# Altium PCB ESP_with_usb.PcbDoc
Units mil, origin at the board's own origin, x right, y up, seen from the top; angles counter-clockwise.
Board outline 1102.36 x 570.87 mil, 2 copper layers (Top Layer, Bottom Layer); 20 components, 18 nets, 80 pads, 15 vias.
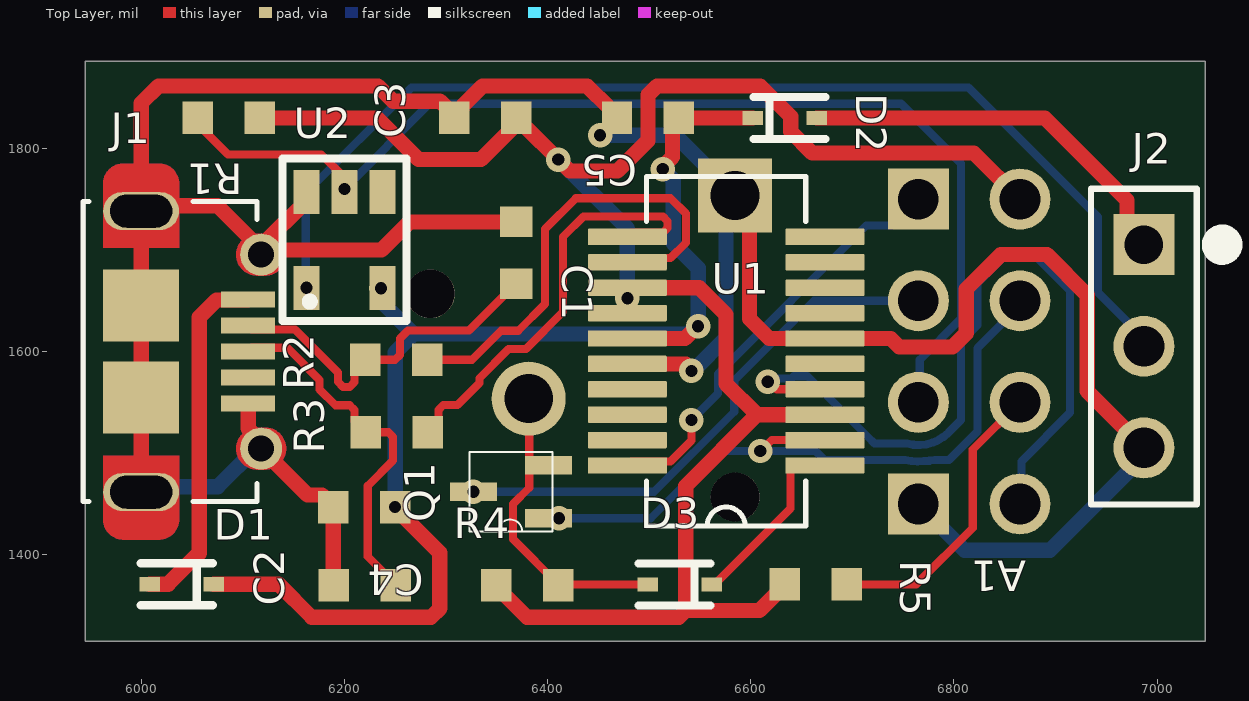
[diagram p0: Top Layer view]
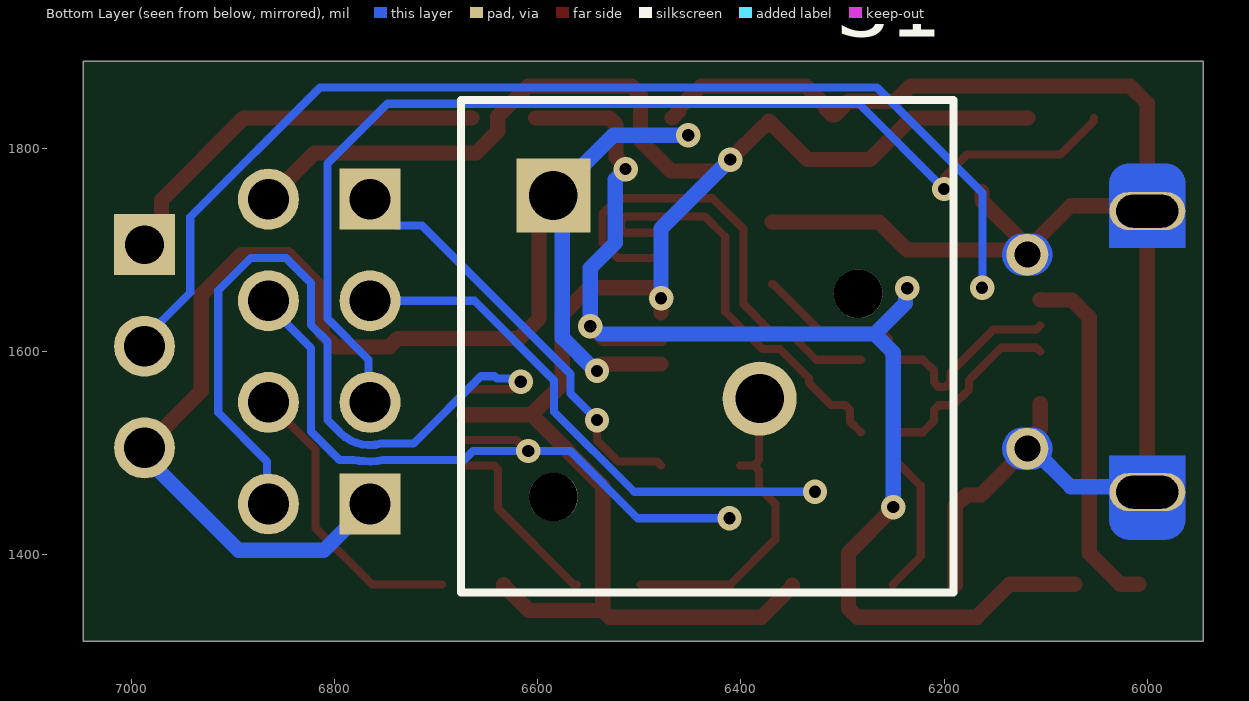
[diagram p1: Bottom Layer view, seen from below]
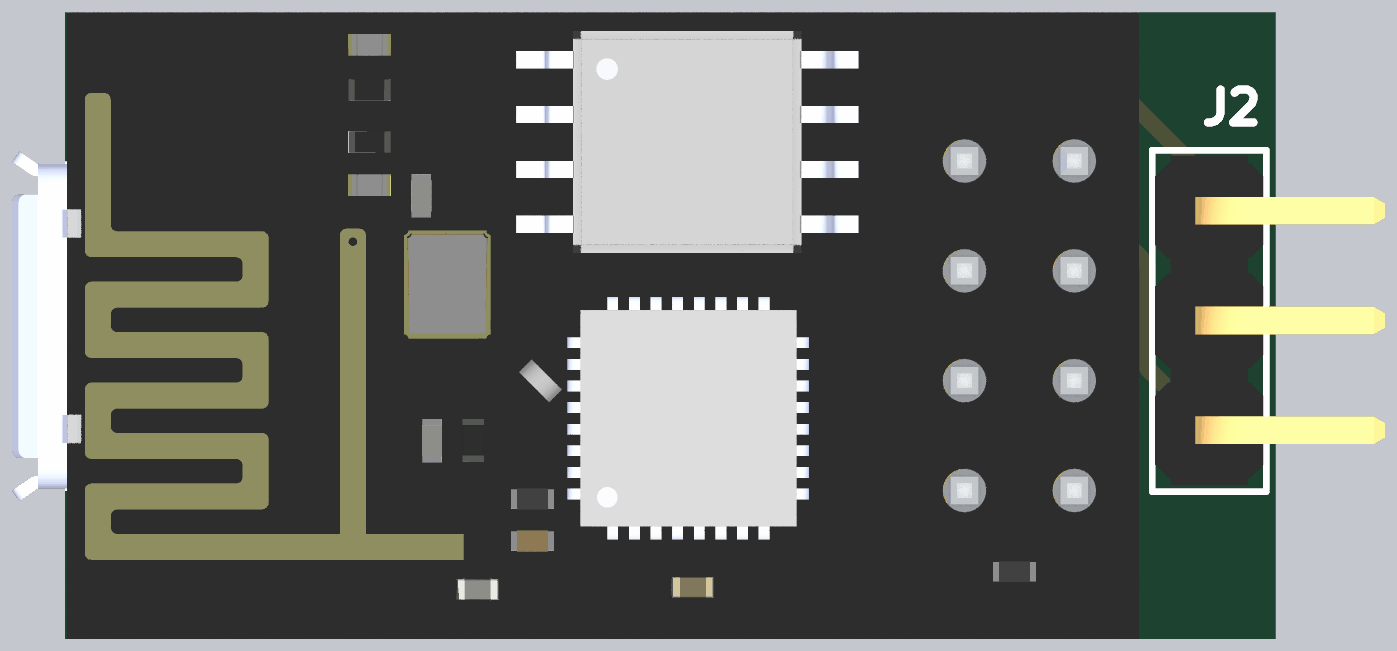
[diagram p2: 3D render of the assembled board from above, using the file's embedded part models]

## Layer stack, top to bottom
Top Solder: solder mask 0.4, Solder Resist, Dk 3.5
Top Layer: signal copper 1.4
Dielectric 1: dielectric 12.6, FR-4, Dk 4.8
Bottom Layer: signal copper 1.4
Bottom Solder: solder mask 0.4, Solder Resist, Dk 3.5

## Board outline
5945,1315 7047.36,1315 7047.36,1885.87 5945,1885.87

## Design rules (kind name [scope] priority, off if disabled: settings)
Clearance [All] p1: gap=8 ignorepadtopadclearanceinfootprint=FALSE except(0: Arc-Hole Track-Hole SMDPad-Hole THPad-Hole Via-Hole Fill-Hole Poly-Hole Region-Hole Text-Hole)
DiffPairsRouting [All] p1: maxlimit=10 minlimit=10 mostfreqgap=10 toplayer_minwidth=8 toplayer_maxwidth=15 toplayer_prefwidth=8 bottomlayer_minwidth=8 bottomlayer_maxwidth=15 bottomlayer_prefwidth=8 maxuncoupledlength=500
MatchedLengths [All] p1: tolerance=50 checknetsindiffpair=TRUE checkdiffpairvsdiffpair=FALSE checkxsignals=FALSE checkothers=FALSE
MinimumSolderMaskSliver [All] p1: minsoldermaskwidth=7.87
PolygonConnect [All] p1: connectstyle=Relief reliefconductorwidth=10 reliefentries=4 polygonreliefangle="90 Angle" airgapwidth=10
RoutingVias [All] p1: holewidth=12 width=24 viastyle="Through Hole" minholewidth=12 minwidth=24 maxholewidth=28 maxwidth=50
SolderMaskExpansion [All] p1: expansion=4 istentingtop=FALSE
Width [All] p1: maxlimit=15 minlimit=8 preferedwidth=8
28 further rules are at their usual default settings.

## Classes and differential pairs
component class ESP_with_usb: A1 C3 C4 C5 D1 D2 J1 J2 R1 S1 U2
differential pair USB2: +USB2_P -USB2_N
differential pair USB1: +USB1_P -USB1_N

## Components (designator, comment, footprint, x,y, rotation, side; value= is the part's Value field where it differs from the comment)
A1 "ESP8266" ESP8266 6865,1450 r180 top
C1 "47pF" 0603 6369.36,1696.01 r270 top value=Value
C2 "47pF" 0603 6221,1370 r0 top value=Value
C3 "0.1uF" 0603 6340,1830 r0 top value=Value
C4 "0.1uF" 0603 6220.64,1446.92 r0 top value=Value
C5 "10uF" 0603 6500,1830 r0 top value=Value
D1 "Diode, Schottky" SOD-523 6039.98,1371.06 r0 top
D2 "Diode, Schottky" SOD-523 6633.36,1830 r180 top
D3 "Diode" SOD-523 6530,1370.86 r0 top
J1 "micro USB B" "Micro USB B (rev 2)" 6002.95,1600 r270 top
J2 "3x Header Pins" "3 HEADER PIN 90 DEG" 6987,1705.28 r90 top value=Value
Q1 "N MOSFET" SOT-323 6364,1462 r180 top
R1 "10K Ω" 0603 6085,1830 r180 top value=Value
R2 "27 Ω" 0603 6250,1592 r180 top value=Value
R3 "27 Ω" 0603 6250.36,1520.59 r180 top value=Value
R4 "10K Ω" 0603 6381,1370 r0 top value=Value
R5 "10K Ω" 0603 6665,1370.86 r0 top value=Value
S1 "Pushbutton switch" KS11R21 6433,1605.28 r180 bottom
U1 "USB interface" 20-SSOP 6575.79,1600.39 r180 top
U2 "Buffer/level shifter" SOT-23-5 6200,1710 r270 top value=Value

## Footprints (in the part's own frame and the unit in brackets; to place one, negate y for a bottom-side part, rotate by r counter-clockwise, add the part's x,y. Pads: shape width x height; smd on the part's side, far side on the other; paste and mask are expansions set on the pad)
"3 HEADER PIN 90 DEG" [mil]
  rect 60x60 hole 38 mask+0: 1(0,0)
  round 60 hole 40 mask+0: 2(-100,0) 3(-200,0)
  silkscreen extent -256,-87 55,52, body extent -250,-160 50,49, height 163
20-SSOP [mm]
  rrect10% 1.97x0.41 smd: 1(-2.47,2.857) 2(-2.47,2.222) 3(-2.47,1.587) 4(-2.47,0.952) 5(-2.47,0.317) 6(-2.47,-0.318) 7(-2.47,-0.953) 8(-2.47,-1.588) 9(-2.47,-2.223) 10(-2.47,-2.858) 11(2.47,-2.857) 12(2.47,-2.222) 13(2.47,-1.587) 14(2.47,-0.952) 15(2.47,-0.317) 16(2.47,0.318) 17(2.47,0.953) 18(2.47,1.588) 19(2.47,2.223) 20(2.47,2.858)
  silkscreen extent -1.99,-4.37 1.99,4.37, body extent -3.1,-4.33 3.1,4.33, height 1.76
0603 [mil]
  rect 30x32 smd paste+0 mask+0: 1(-31.64,0) 2(29.36,0)
  body extent -33,-16 30,16, height 28
ESP8266 [mil]
  round 60 hole 40: 1(0,0) 2(0,-100) 3(0,-200) 4(0,-300) 6(100,-200) 7(100,-100)
  rect 60x60 hole 40: 5(100,-300) 8(100,0)
  body extent -58,-436 918,135, height 221
KS11R21 [mm]
  rect 1.85x1.85 hole 1.22: 1(-3.85,3.77)
  round 1.85 hole 1.22: 3(1.31,-1.31)
  round 1.22 hole 1.22 unplated: ""(-3.85,-3.77) ""(3.77,1.31)
  silkscreen extent -6.16,-6.16 6.16,6.16, body extent -6.07,-6.25 6.25,6.07, height 9.86
"Micro USB B (rev 2)" [mm]
  rect 0.4x1.35 smd: 1(-1.3,2.6) 2(-0.65,2.6) 3(0,2.6) 4(0.65,2.6) 5(1.3,2.6)
  round 1.05 hole 0.65: S1(-2.425,2.925) S2(2.425,2.925)
  oval 0.95x1.9 hole 0.825 slot 1.55 at 90 deg: S3(-3.512,-0.075) S6(3.512,-0.075)
  rect 1.8x1.9 smd: S4(-1.15,-0.075) S5(1.15,-0.075)
  Top Layer region: -2.425,3.35 -2.425,3.55 -2.398,3.549 -2.37,3.547 -2.343,3.544 -2.316,3.539 -2.289,3.532 -2.263,3.524 -2.237,3.515 -2.211,3.505 -2.187,3.493 -2.163,3.48 -2.139,3.465 -2.116,3.45 -2.095,3.433 -2.074,3.415 -2.054,3.396 -2.035,3.376 -2.017,3.355 -2,3.334 -1.985,3.311 -1.97,3.287 -1.957,3.263 -1.945,3.239 -1.935,3.213 -1.926,3.187 -1.918,3.161 -1.911,3.134 -1.906,3.107 -1.903,3.08 -1.901,3.052 -1.9,3.025 -1.9,2.825 -1.901,2.798 -1.903,2.77 -1.906,2.743 -1.911,2.716 -1.918,2.689 -1.926,2.663 -1.935,2.637 -1.945,2.611 -1.957,2.587 -1.97,2.562 -1.985,2.539 -2,2.516 -2.017,2.495 -2.035,2.474 -2.054,2.454 -2.074,2.435 -2.095,2.417 -2.116,2.4 -2.139,2.385 -2.163,2.37 -2.187,2.357 -2.211,2.345 -2.237,2.335 -2.263,2.326 -2.289,2.318 -2.316,2.311 -2.343,2.306 -2.37,2.303 -2.398,2.301 -2.425,2.3 -2.425,2.5 -2.408,2.5 -2.391,2.502 -2.374,2.504 -2.357,2.507 -2.341,2.511 -2.325,2.516 -2.309,2.522 -2.293,2.528 -2.277,2.535 -2.262,2.544 -2.248,2.552 -2.234,2.562 -2.22,2.572 -2.208,2.583 -2.195,2.595 -2.183,2.608 -2.172,2.62 -2.162,2.634 -2.152,2.648 -2.144,2.662 -2.135,2.677 -2.128,2.693 -2.122,2.709 -2.116,2.725 -2.111,2.741 -2.107,2.757 -2.104,2.774 -2.102,2.791 -2.1,2.808 -2.1,2.825 -2.1,3.025 -2.1,3.042 -2.102,3.059 -2.104,3.076 -2.107,3.093 -2.111,3.109 -2.116,3.125 -2.122,3.141 -2.128,3.157 -2.135,3.173 -2.144,3.187 -2.152,3.202 -2.162,3.216 -2.172,3.23 -2.183,3.242 -2.195,3.255 -2.208,3.267 -2.22,3.278 -2.234,3.288 -2.248,3.298 -2.262,3.306 -2.277,3.315 -2.293,3.322 -2.309,3.328 -2.325,3.334 -2.341,3.339 -2.357,3.343 -2.374,3.346 -2.391,3.348 -2.408,3.35 -2.425,3.35
  Top Layer region: -2.425,2.5 -2.425,2.3 -2.452,2.301 -2.48,2.303 -2.507,2.306 -2.534,2.311 -2.561,2.318 -2.587,2.326 -2.613,2.335 -2.639,2.345 -2.663,2.357 -2.688,2.37 -2.711,2.385 -2.734,2.4 -2.755,2.417 -2.776,2.435 -2.796,2.454 -2.815,2.474 -2.833,2.495 -2.85,2.516 -2.865,2.539 -2.88,2.562 -2.893,2.587 -2.905,2.611 -2.915,2.637 -2.924,2.663 -2.932,2.689 -2.939,2.716 -2.944,2.743 -2.947,2.77 -2.949,2.798 -2.95,2.825 -2.95,3.025 -2.949,3.052 -2.947,3.08 -2.944,3.107 -2.939,3.134 -2.932,3.161 -2.924,3.187 -2.915,3.213 -2.905,3.239 -2.893,3.263 -2.88,3.287 -2.865,3.311 -2.85,3.334 -2.833,3.355 -2.815,3.376 -2.796,3.396 -2.776,3.415 -2.755,3.433 -2.734,3.45 -2.711,3.465 -2.688,3.48 -2.663,3.493 -2.639,3.505 -2.613,3.515 -2.587,3.524 -2.561,3.532 -2.534,3.539 -2.507,3.544 -2.48,3.547 -2.452,3.549 -2.425,3.55 -2.425,3.35 -2.442,3.35 -2.459,3.348 -2.476,3.346 -2.493,3.343 -2.509,3.339 -2.525,3.334 -2.541,3.328 -2.557,3.322 -2.573,3.315 -2.588,3.306 -2.602,3.298 -2.616,3.288 -2.63,3.278 -2.642,3.267 -2.655,3.255 -2.667,3.242 -2.678,3.23 -2.688,3.216 -2.698,3.202 -2.706,3.187 -2.715,3.173 -2.722,3.157 -2.728,3.141 -2.734,3.125 -2.739,3.109 -2.743,3.093 -2.746,3.076 -2.748,3.059 -2.75,3.042 -2.75,3.025 -2.75,2.825 -2.75,2.808 -2.748,2.791 -2.746,2.774 -2.743,2.757 -2.739,2.741 -2.734,2.725 -2.728,2.709 -2.722,2.693 -2.715,2.677 -2.706,2.662 -2.698,2.648 -2.688,2.634 -2.678,2.62 -2.667,2.608 -2.655,2.595 -2.642,2.583 -2.63,2.572 -2.616,2.562 -2.602,2.552 -2.588,2.544 -2.573,2.535 -2.557,2.528 -2.541,2.522 -2.525,2.516 -2.509,2.511 -2.493,2.507 -2.476,2.504 -2.459,2.502 -2.442,2.5 -2.425,2.5
  Top Layer region: 2.425,3.35 2.425,3.55 2.452,3.549 2.48,3.547 2.507,3.544 2.534,3.539 2.561,3.532 2.587,3.524 2.613,3.515 2.639,3.505 2.663,3.493 2.688,3.48 2.711,3.465 2.734,3.45 2.755,3.433 2.776,3.415 2.796,3.396 2.815,3.376 2.833,3.355 2.85,3.334 2.865,3.311 2.88,3.287 2.893,3.263 2.905,3.239 2.915,3.213 2.924,3.187 2.932,3.161 2.939,3.134 2.944,3.107 2.947,3.08 2.949,3.052 2.95,3.025 2.95,2.825 2.949,2.798 2.947,2.77 2.944,2.743 2.939,2.716 2.932,2.689 2.924,2.663 2.915,2.637 2.905,2.611 2.893,2.587 2.88,2.562 2.865,2.539 2.85,2.516 2.833,2.495 2.815,2.474 2.796,2.454 2.776,2.435 2.755,2.417 2.734,2.4 2.711,2.385 2.688,2.37 2.663,2.357 2.639,2.345 2.613,2.335 2.587,2.326 2.561,2.318 2.534,2.311 2.507,2.306 2.48,2.303 2.452,2.301 2.425,2.3 2.425,2.5 2.442,2.5 2.459,2.502 2.476,2.504 2.493,2.507 2.509,2.511 2.525,2.516 2.541,2.522 2.557,2.528 2.573,2.535 2.588,2.544 2.602,2.552 2.616,2.562 2.63,2.572 2.642,2.583 2.655,2.595 2.667,2.608 2.678,2.62 2.688,2.634 2.698,2.648 2.706,2.662 2.715,2.677 2.722,2.693 2.728,2.709 2.734,2.725 2.739,2.741 2.743,2.757 2.746,2.774 2.748,2.791 2.75,2.808 2.75,2.825 2.75,3.025 2.75,3.042 2.748,3.059 2.746,3.076 2.743,3.093 2.739,3.109 2.734,3.125 2.728,3.141 2.722,3.157 2.715,3.173 2.706,3.187 2.698,3.202 2.688,3.216 2.678,3.23 2.667,3.242 2.655,3.255 2.642,3.267 2.63,3.278 2.616,3.288 2.602,3.298 2.588,3.306 2.573,3.315 2.557,3.322 2.541,3.328 2.525,3.334 2.509,3.339 2.493,3.343 2.476,3.346 2.459,3.348 2.442,3.35 2.425,3.35
  Top Layer region: 2.425,2.5 2.425,2.3 2.398,2.301 2.37,2.303 2.343,2.306 2.316,2.311 2.289,2.318 2.263,2.326 2.237,2.335 2.211,2.345 2.187,2.357 2.163,2.37 2.139,2.385 2.116,2.4 2.095,2.417 2.074,2.435 2.054,2.454 2.035,2.474 2.017,2.495 2,2.516 1.985,2.539 1.97,2.562 1.957,2.587 1.945,2.611 1.935,2.637 1.926,2.663 1.918,2.689 1.911,2.716 1.906,2.743 1.903,2.77 1.901,2.798 1.9,2.825 1.9,3.025 1.901,3.052 1.903,3.08 1.906,3.107 1.911,3.134 1.918,3.161 1.926,3.187 1.935,3.213 1.945,3.239 1.957,3.263 1.97,3.287 1.985,3.311 2,3.334 2.017,3.355 2.035,3.376 2.054,3.396 2.074,3.415 2.095,3.433 2.116,3.45 2.139,3.465 2.163,3.48 2.187,3.493 2.211,3.505 2.237,3.515 2.263,3.524 2.289,3.532 2.316,3.539 2.343,3.544 2.37,3.547 2.398,3.549 2.425,3.55 2.425,3.35 2.408,3.35 2.391,3.348 2.374,3.346 2.357,3.343 2.341,3.339 2.325,3.334 2.309,3.328 2.293,3.322 2.277,3.315 2.262,3.306 2.248,3.298 2.234,3.288 2.22,3.278 2.208,3.267 2.195,3.255 2.183,3.242 2.172,3.23 2.162,3.216 2.152,3.202 2.144,3.187 2.135,3.173 2.128,3.157 2.122,3.141 2.116,3.125 2.111,3.109 2.107,3.093 2.104,3.076 2.102,3.059 2.1,3.042 2.1,3.025 2.1,2.825 2.1,2.808 2.102,2.791 2.104,2.774 2.107,2.757 2.111,2.741 2.116,2.725 2.122,2.709 2.128,2.693 2.135,2.677 2.144,2.662 2.152,2.648 2.162,2.634 2.172,2.62 2.183,2.608 2.195,2.595 2.208,2.583 2.22,2.572 2.234,2.562 2.248,2.552 2.262,2.544 2.277,2.535 2.293,2.528 2.309,2.522 2.325,2.516 2.341,2.511 2.357,2.507 2.374,2.504 2.391,2.502 2.408,2.5 2.425,2.5
  Top Layer region: -2.6,0.875 -4.2,0.875 -4.226,0.874 -4.252,0.872 -4.278,0.869 -4.304,0.864 -4.329,0.858 -4.355,0.851 -4.379,0.842 -4.403,0.832 -4.427,0.821 -4.45,0.808 -4.472,0.794 -4.494,0.78 -4.515,0.764 -4.535,0.747 -4.554,0.729 -4.572,0.71 -4.589,0.69 -4.605,0.669 -4.619,0.647 -4.633,0.625 -4.645,0.602 -4.657,0.578 -4.667,0.554 -4.676,0.53 -4.683,0.504 -4.689,0.479 -4.694,0.453 -4.697,0.427 -4.699,0.401 -4.7,0.375 -4.7,-0.075 -3.925,-0.075 -3.925,0.375 -3.925,0.391 -3.923,0.406 -3.921,0.422 -3.918,0.437 -3.915,0.453 -3.91,0.468 -3.905,0.483 -3.899,0.497 -3.892,0.511 -3.885,0.525 -3.877,0.538 -3.868,0.551 -3.858,0.564 -3.848,0.576 -3.837,0.587 -3.826,0.598 -3.814,0.608 -3.801,0.618 -3.788,0.627 -3.775,0.635 -3.761,0.642 -3.747,0.649 -3.733,0.655 -3.718,0.66 -3.703,0.665 -3.687,0.668 -3.672,0.671 -3.656,0.673 -3.641,0.675 -3.625,0.675 -3.4,0.675 -3.384,0.675 -3.369,0.673 -3.353,0.671 -3.338,0.668 -3.322,0.665 -3.307,0.66 -3.292,0.655 -3.278,0.649 -3.264,0.642 -3.25,0.635 -3.237,0.627 -3.224,0.618 -3.211,0.608 -3.199,0.598 -3.188,0.587 -3.177,0.576 -3.167,0.564 -3.157,0.551 -3.148,0.538 -3.14,0.525 -3.133,0.511 -3.126,0.497 -3.12,0.483 -3.115,0.468 -3.11,0.453 -3.107,0.437 -3.104,0.422 -3.102,0.406 -3.1,0.391 -3.1,0.375 -3.1,-0.075 -2.6,-0.075 -2.6,0.875
  Top Layer region: 2.6,-1.025 4.2,-1.025 4.226,-1.024 4.252,-1.022 4.278,-1.019 4.304,-1.014 4.329,-1.008 4.355,-1.001 4.379,-0.992 4.403,-0.982 4.427,-0.971 4.45,-0.958 4.472,-0.944 4.494,-0.93 4.515,-0.914 4.535,-0.897 4.554,-0.879 4.572,-0.86 4.589,-0.84 4.605,-0.819 4.619,-0.797 4.633,-0.775 4.645,-0.752 4.657,-0.728 4.667,-0.704 4.676,-0.68 4.683,-0.654 4.689,-0.629 4.694,-0.603 4.697,-0.577 4.699,-0.551 4.7,-0.525 4.7,-0.075 3.925,-0.075 3.925,-0.525 3.925,-0.541 3.923,-0.556 3.921,-0.572 3.918,-0.587 3.915,-0.603 3.91,-0.618 3.905,-0.633 3.899,-0.647 3.892,-0.661 3.885,-0.675 3.877,-0.688 3.868,-0.701 3.858,-0.714 3.848,-0.726 3.837,-0.737 3.826,-0.748 3.814,-0.758 3.801,-0.768 3.788,-0.777 3.775,-0.785 3.761,-0.792 3.747,-0.799 3.733,-0.805 3.718,-0.81 3.703,-0.815 3.687,-0.818 3.672,-0.821 3.656,-0.823 3.641,-0.825 3.625,-0.825 3.4,-0.825 3.384,-0.825 3.369,-0.823 3.353,-0.821 3.338,-0.818 3.322,-0.815 3.307,-0.81 3.292,-0.805 3.278,-0.799 3.264,-0.792 3.25,-0.785 3.237,-0.777 3.224,-0.768 3.211,-0.758 3.199,-0.748 3.188,-0.737 3.177,-0.726 3.167,-0.714 3.157,-0.701 3.148,-0.688 3.14,-0.675 3.133,-0.661 3.126,-0.647 3.12,-0.633 3.115,-0.618 3.11,-0.603 3.107,-0.587 3.104,-0.572 3.102,-0.556 3.1,-0.541 3.1,-0.525 3.1,-0.075 2.6,-0.075 2.6,-1.025
  Top Layer region: -3.1,-0.075 -2.6,-0.075 -2.6,-1.025 -4.2,-1.025 -4.226,-1.024 -4.252,-1.022 -4.278,-1.019 -4.304,-1.014 -4.329,-1.008 -4.355,-1.001 -4.379,-0.992 -4.403,-0.982 -4.427,-0.971 -4.45,-0.958 -4.472,-0.944 -4.494,-0.93 -4.515,-0.914 -4.535,-0.897 -4.554,-0.879 -4.572,-0.86 -4.589,-0.84 -4.605,-0.819 -4.619,-0.797 -4.633,-0.775 -4.645,-0.752 -4.657,-0.728 -4.667,-0.704 -4.676,-0.68 -4.683,-0.654 -4.689,-0.629 -4.694,-0.603 -4.697,-0.577 -4.699,-0.551 -4.7,-0.525 -4.7,-0.075 -3.925,-0.075 -3.925,-0.55 -3.925,-0.564 -3.923,-0.579 -3.922,-0.593 -3.919,-0.607 -3.916,-0.621 -3.912,-0.635 -3.907,-0.649 -3.901,-0.662 -3.895,-0.675 -3.888,-0.687 -3.881,-0.7 -3.872,-0.712 -3.864,-0.723 -3.854,-0.734 -3.844,-0.744 -3.834,-0.754 -3.823,-0.764 -3.812,-0.772 -3.8,-0.781 -3.788,-0.788 -3.775,-0.795 -3.762,-0.801 -3.749,-0.807 -3.735,-0.812 -3.721,-0.816 -3.707,-0.819 -3.693,-0.822 -3.679,-0.823 -3.664,-0.825 -3.65,-0.825 -3.4,-0.825 -3.384,-0.825 -3.369,-0.823 -3.353,-0.821 -3.338,-0.818 -3.322,-0.815 -3.307,-0.81 -3.292,-0.805 -3.278,-0.799 -3.264,-0.792 -3.25,-0.785 -3.237,-0.777 -3.224,-0.768 -3.211,-0.758 -3.199,-0.748 -3.188,-0.737 -3.177,-0.726 -3.167,-0.714 -3.157,-0.701 -3.148,-0.688 -3.14,-0.675 -3.133,-0.661 -3.126,-0.647 -3.12,-0.633 -3.115,-0.618 -3.11,-0.603 -3.107,-0.587 -3.104,-0.572 -3.102,-0.556 -3.1,-0.541 -3.1,-0.525 -3.1,-0.075
  Top Layer region: 3.1,-0.075 2.6,-0.075 2.6,0.875 4.2,0.875 4.226,0.874 4.252,0.872 4.278,0.869 4.304,0.864 4.329,0.858 4.355,0.851 4.379,0.842 4.403,0.832 4.427,0.821 4.45,0.808 4.472,0.794 4.494,0.78 4.515,0.764 4.535,0.747 4.554,0.729 4.572,0.71 4.589,0.69 4.605,0.669 4.619,0.647 4.633,0.625 4.645,0.602 4.657,0.578 4.667,0.554 4.676,0.53 4.683,0.504 4.689,0.479 4.694,0.453 4.697,0.427 4.699,0.401 4.7,0.375 4.7,-0.075 3.925,-0.075 3.925,0.4 3.925,0.414 3.923,0.429 3.922,0.443 3.919,0.457 3.916,0.471 3.912,0.485 3.907,0.499 3.901,0.512 3.895,0.525 3.888,0.537 3.881,0.55 3.872,0.562 3.864,0.573 3.854,0.584 3.844,0.594 3.834,0.604 3.823,0.614 3.812,0.622 3.8,0.631 3.788,0.638 3.775,0.645 3.762,0.651 3.749,0.657 3.735,0.662 3.721,0.666 3.707,0.669 3.693,0.672 3.679,0.673 3.664,0.675 3.65,0.675 3.4,0.675 3.384,0.675 3.369,0.673 3.353,0.671 3.338,0.668 3.322,0.665 3.307,0.66 3.292,0.655 3.278,0.649 3.264,0.642 3.25,0.635 3.237,0.627 3.224,0.618 3.211,0.608 3.199,0.598 3.188,0.587 3.177,0.576 3.167,0.564 3.157,0.551 3.148,0.538 3.14,0.525 3.133,0.511 3.126,0.497 3.12,0.483 3.115,0.468 3.11,0.453 3.107,0.437 3.104,0.422 3.102,0.406 3.1,0.391 3.1,0.375 3.1,-0.075
  Bottom Layer region: -2.425,3.35 -2.425,3.55 -2.398,3.549 -2.37,3.547 -2.343,3.544 -2.316,3.539 -2.289,3.532 -2.263,3.524 -2.237,3.515 -2.211,3.505 -2.187,3.493 -2.163,3.48 -2.139,3.465 -2.116,3.45 -2.095,3.433 -2.074,3.415 -2.054,3.396 -2.035,3.376 -2.017,3.355 -2,3.334 -1.985,3.311 -1.97,3.287 -1.957,3.263 -1.945,3.239 -1.935,3.213 -1.926,3.187 -1.918,3.161 -1.911,3.134 -1.906,3.107 -1.903,3.08 -1.901,3.052 -1.9,3.025 -1.9,2.825 -1.901,2.798 -1.903,2.77 -1.906,2.743 -1.911,2.716 -1.918,2.689 -1.926,2.663 -1.935,2.637 -1.945,2.611 -1.957,2.587 -1.97,2.562 -1.985,2.539 -2,2.516 -2.017,2.495 -2.035,2.474 -2.054,2.454 -2.074,2.435 -2.095,2.417 -2.116,2.4 -2.139,2.385 -2.163,2.37 -2.187,2.357 -2.211,2.345 -2.237,2.335 -2.263,2.326 -2.289,2.318 -2.316,2.311 -2.343,2.306 -2.37,2.303 -2.398,2.301 -2.425,2.3 -2.425,2.5 -2.408,2.5 -2.391,2.502 -2.374,2.504 -2.357,2.507 -2.341,2.511 -2.325,2.516 -2.309,2.522 -2.293,2.528 -2.277,2.535 -2.262,2.544 -2.248,2.552 -2.234,2.562 -2.22,2.572 -2.208,2.583 -2.195,2.595 -2.183,2.608 -2.172,2.62 -2.162,2.634 -2.152,2.648 -2.144,2.662 -2.135,2.677 -2.128,2.693 -2.122,2.709 -2.116,2.725 -2.111,2.741 -2.107,2.757 -2.104,2.774 -2.102,2.791 -2.1,2.808 -2.1,2.825 -2.1,3.025 -2.1,3.042 -2.102,3.059 -2.104,3.076 -2.107,3.093 -2.111,3.109 -2.116,3.125 -2.122,3.141 -2.128,3.157 -2.135,3.173 -2.144,3.187 -2.152,3.202 -2.162,3.216 -2.172,3.23 -2.183,3.242 -2.195,3.255 -2.208,3.267 -2.22,3.278 -2.234,3.288 -2.248,3.298 -2.262,3.306 -2.277,3.315 -2.293,3.322 -2.309,3.328 -2.325,3.334 -2.341,3.339 -2.357,3.343 -2.374,3.346 -2.391,3.348 -2.408,3.35 -2.425,3.35
  Bottom Layer region: -2.425,2.5 -2.425,2.3 -2.452,2.301 -2.48,2.303 -2.507,2.306 -2.534,2.311 -2.561,2.318 -2.587,2.326 -2.613,2.335 -2.639,2.345 -2.663,2.357 -2.688,2.37 -2.711,2.385 -2.734,2.4 -2.755,2.417 -2.776,2.435 -2.796,2.454 -2.815,2.474 -2.833,2.495 -2.85,2.516 -2.865,2.539 -2.88,2.562 -2.893,2.587 -2.905,2.611 -2.915,2.637 -2.924,2.663 -2.932,2.689 -2.939,2.716 -2.944,2.743 -2.947,2.77 -2.949,2.798 -2.95,2.825 -2.95,3.025 -2.949,3.052 -2.947,3.08 -2.944,3.107 -2.939,3.134 -2.932,3.161 -2.924,3.187 -2.915,3.213 -2.905,3.239 -2.893,3.263 -2.88,3.287 -2.865,3.311 -2.85,3.334 -2.833,3.355 -2.815,3.376 -2.796,3.396 -2.776,3.415 -2.755,3.433 -2.734,3.45 -2.711,3.465 -2.688,3.48 -2.663,3.493 -2.639,3.505 -2.613,3.515 -2.587,3.524 -2.561,3.532 -2.534,3.539 -2.507,3.544 -2.48,3.547 -2.452,3.549 -2.425,3.55 -2.425,3.35 -2.442,3.35 -2.459,3.348 -2.476,3.346 -2.493,3.343 -2.509,3.339 -2.525,3.334 -2.541,3.328 -2.557,3.322 -2.573,3.315 -2.588,3.306 -2.602,3.298 -2.616,3.288 -2.63,3.278 -2.642,3.267 -2.655,3.255 -2.667,3.242 -2.678,3.23 -2.688,3.216 -2.698,3.202 -2.706,3.187 -2.715,3.173 -2.722,3.157 -2.728,3.141 -2.734,3.125 -2.739,3.109 -2.743,3.093 -2.746,3.076 -2.748,3.059 -2.75,3.042 -2.75,3.025 -2.75,2.825 -2.75,2.808 -2.748,2.791 -2.746,2.774 -2.743,2.757 -2.739,2.741 -2.734,2.725 -2.728,2.709 -2.722,2.693 -2.715,2.677 -2.706,2.662 -2.698,2.648 -2.688,2.634 -2.678,2.62 -2.667,2.608 -2.655,2.595 -2.642,2.583 -2.63,2.572 -2.616,2.562 -2.602,2.552 -2.588,2.544 -2.573,2.535 -2.557,2.528 -2.541,2.522 -2.525,2.516 -2.509,2.511 -2.493,2.507 -2.476,2.504 -2.459,2.502 -2.442,2.5 -2.425,2.5
  Bottom Layer region: 2.425,3.35 2.425,3.55 2.452,3.549 2.48,3.547 2.507,3.544 2.534,3.539 2.561,3.532 2.587,3.524 2.613,3.515 2.639,3.505 2.663,3.493 2.688,3.48 2.711,3.465 2.734,3.45 2.755,3.433 2.776,3.415 2.796,3.396 2.815,3.376 2.833,3.355 2.85,3.334 2.865,3.311 2.88,3.287 2.893,3.263 2.905,3.239 2.915,3.213 2.924,3.187 2.932,3.161 2.939,3.134 2.944,3.107 2.947,3.08 2.949,3.052 2.95,3.025 2.95,2.825 2.949,2.798 2.947,2.77 2.944,2.743 2.939,2.716 2.932,2.689 2.924,2.663 2.915,2.637 2.905,2.611 2.893,2.587 2.88,2.562 2.865,2.539 2.85,2.516 2.833,2.495 2.815,2.474 2.796,2.454 2.776,2.435 2.755,2.417 2.734,2.4 2.711,2.385 2.688,2.37 2.663,2.357 2.639,2.345 2.613,2.335 2.587,2.326 2.561,2.318 2.534,2.311 2.507,2.306 2.48,2.303 2.452,2.301 2.425,2.3 2.425,2.5 2.442,2.5 2.459,2.502 2.476,2.504 2.493,2.507 2.509,2.511 2.525,2.516 2.541,2.522 2.557,2.528 2.573,2.535 2.588,2.544 2.602,2.552 2.616,2.562 2.63,2.572 2.642,2.583 2.655,2.595 2.667,2.608 2.678,2.62 2.688,2.634 2.698,2.648 2.706,2.662 2.715,2.677 2.722,2.693 2.728,2.709 2.734,2.725 2.739,2.741 2.743,2.757 2.746,2.774 2.748,2.791 2.75,2.808 2.75,2.825 2.75,3.025 2.75,3.042 2.748,3.059 2.746,3.076 2.743,3.093 2.739,3.109 2.734,3.125 2.728,3.141 2.722,3.157 2.715,3.173 2.706,3.187 2.698,3.202 2.688,3.216 2.678,3.23 2.667,3.242 2.655,3.255 2.642,3.267 2.63,3.278 2.616,3.288 2.602,3.298 2.588,3.306 2.573,3.315 2.557,3.322 2.541,3.328 2.525,3.334 2.509,3.339 2.493,3.343 2.476,3.346 2.459,3.348 2.442,3.35 2.425,3.35
  Bottom Layer region: 2.425,2.5 2.425,2.3 2.398,2.301 2.37,2.303 2.343,2.306 2.316,2.311 2.289,2.318 2.263,2.326 2.237,2.335 2.211,2.345 2.187,2.357 2.163,2.37 2.139,2.385 2.116,2.4 2.095,2.417 2.074,2.435 2.054,2.454 2.035,2.474 2.017,2.495 2,2.516 1.985,2.539 1.97,2.562 1.957,2.587 1.945,2.611 1.935,2.637 1.926,2.663 1.918,2.689 1.911,2.716 1.906,2.743 1.903,2.77 1.901,2.798 1.9,2.825 1.9,3.025 1.901,3.052 1.903,3.08 1.906,3.107 1.911,3.134 1.918,3.161 1.926,3.187 1.935,3.213 1.945,3.239 1.957,3.263 1.97,3.287 1.985,3.311 2,3.334 2.017,3.355 2.035,3.376 2.054,3.396 2.074,3.415 2.095,3.433 2.116,3.45 2.139,3.465 2.163,3.48 2.187,3.493 2.211,3.505 2.237,3.515 2.263,3.524 2.289,3.532 2.316,3.539 2.343,3.544 2.37,3.547 2.398,3.549 2.425,3.55 2.425,3.35 2.408,3.35 2.391,3.348 2.374,3.346 2.357,3.343 2.341,3.339 2.325,3.334 2.309,3.328 2.293,3.322 2.277,3.315 2.262,3.306 2.248,3.298 2.234,3.288 2.22,3.278 2.208,3.267 2.195,3.255 2.183,3.242 2.172,3.23 2.162,3.216 2.152,3.202 2.144,3.187 2.135,3.173 2.128,3.157 2.122,3.141 2.116,3.125 2.111,3.109 2.107,3.093 2.104,3.076 2.102,3.059 2.1,3.042 2.1,3.025 2.1,2.825 2.1,2.808 2.102,2.791 2.104,2.774 2.107,2.757 2.111,2.741 2.116,2.725 2.122,2.709 2.128,2.693 2.135,2.677 2.144,2.662 2.152,2.648 2.162,2.634 2.172,2.62 2.183,2.608 2.195,2.595 2.208,2.583 2.22,2.572 2.234,2.562 2.248,2.552 2.262,2.544 2.277,2.535 2.293,2.528 2.309,2.522 2.325,2.516 2.341,2.511 2.357,2.507 2.374,2.504 2.391,2.502 2.408,2.5 2.425,2.5
  Bottom Layer region: -2.6,0.875 -4.2,0.875 -4.226,0.874 -4.252,0.872 -4.278,0.869 -4.304,0.864 -4.329,0.858 -4.355,0.851 -4.379,0.842 -4.403,0.832 -4.427,0.821 -4.45,0.808 -4.472,0.794 -4.494,0.78 -4.515,0.764 -4.535,0.747 -4.554,0.729 -4.572,0.71 -4.589,0.69 -4.605,0.669 -4.619,0.647 -4.633,0.625 -4.645,0.602 -4.657,0.578 -4.667,0.554 -4.676,0.53 -4.683,0.504 -4.689,0.479 -4.694,0.453 -4.697,0.427 -4.699,0.401 -4.7,0.375 -4.7,-0.075 -3.925,-0.075 -3.925,0.375 -3.925,0.391 -3.923,0.406 -3.921,0.422 -3.918,0.437 -3.915,0.453 -3.91,0.468 -3.905,0.483 -3.899,0.497 -3.892,0.511 -3.885,0.525 -3.877,0.538 -3.868,0.551 -3.858,0.564 -3.848,0.576 -3.837,0.587 -3.826,0.598 -3.814,0.608 -3.801,0.618 -3.788,0.627 -3.775,0.635 -3.761,0.642 -3.747,0.649 -3.733,0.655 -3.718,0.66 -3.703,0.665 -3.687,0.668 -3.672,0.671 -3.656,0.673 -3.641,0.675 -3.625,0.675 -3.4,0.675 -3.384,0.675 -3.369,0.673 -3.353,0.671 -3.338,0.668 -3.322,0.665 -3.307,0.66 -3.292,0.655 -3.278,0.649 -3.264,0.642 -3.25,0.635 -3.237,0.627 -3.224,0.618 -3.211,0.608 -3.199,0.598 -3.188,0.587 -3.177,0.576 -3.167,0.564 -3.157,0.551 -3.148,0.538 -3.14,0.525 -3.133,0.511 -3.126,0.497 -3.12,0.483 -3.115,0.468 -3.11,0.453 -3.107,0.437 -3.104,0.422 -3.102,0.406 -3.1,0.391 -3.1,0.375 -3.1,-0.075 -2.6,-0.075 -2.6,0.875
  Bottom Layer region: 2.6,-1.025 4.2,-1.025 4.226,-1.024 4.252,-1.022 4.278,-1.019 4.304,-1.014 4.329,-1.008 4.355,-1.001 4.379,-0.992 4.403,-0.982 4.427,-0.971 4.45,-0.958 4.472,-0.944 4.494,-0.93 4.515,-0.914 4.535,-0.897 4.554,-0.879 4.572,-0.86 4.589,-0.84 4.605,-0.819 4.619,-0.797 4.633,-0.775 4.645,-0.752 4.657,-0.728 4.667,-0.704 4.676,-0.68 4.683,-0.654 4.689,-0.629 4.694,-0.603 4.697,-0.577 4.699,-0.551 4.7,-0.525 4.7,-0.075 3.925,-0.075 3.925,-0.525 3.925,-0.541 3.923,-0.556 3.921,-0.572 3.918,-0.587 3.915,-0.603 3.91,-0.618 3.905,-0.633 3.899,-0.647 3.892,-0.661 3.885,-0.675 3.877,-0.688 3.868,-0.701 3.858,-0.714 3.848,-0.726 3.837,-0.737 3.826,-0.748 3.814,-0.758 3.801,-0.768 3.788,-0.777 3.775,-0.785 3.761,-0.792 3.747,-0.799 3.733,-0.805 3.718,-0.81 3.703,-0.815 3.687,-0.818 3.672,-0.821 3.656,-0.823 3.641,-0.825 3.625,-0.825 3.4,-0.825 3.384,-0.825 3.369,-0.823 3.353,-0.821 3.338,-0.818 3.322,-0.815 3.307,-0.81 3.292,-0.805 3.278,-0.799 3.264,-0.792 3.25,-0.785 3.237,-0.777 3.224,-0.768 3.211,-0.758 3.199,-0.748 3.188,-0.737 3.177,-0.726 3.167,-0.714 3.157,-0.701 3.148,-0.688 3.14,-0.675 3.133,-0.661 3.126,-0.647 3.12,-0.633 3.115,-0.618 3.11,-0.603 3.107,-0.587 3.104,-0.572 3.102,-0.556 3.1,-0.541 3.1,-0.525 3.1,-0.075 2.6,-0.075 2.6,-1.025
  Bottom Layer region: -3.1,-0.075 -2.6,-0.075 -2.6,-1.025 -4.2,-1.025 -4.226,-1.024 -4.252,-1.022 -4.278,-1.019 -4.304,-1.014 -4.329,-1.008 -4.355,-1.001 -4.379,-0.992 -4.403,-0.982 -4.427,-0.971 -4.45,-0.958 -4.472,-0.944 -4.494,-0.93 -4.515,-0.914 -4.535,-0.897 -4.554,-0.879 -4.572,-0.86 -4.589,-0.84 -4.605,-0.819 -4.619,-0.797 -4.633,-0.775 -4.645,-0.752 -4.657,-0.728 -4.667,-0.704 -4.676,-0.68 -4.683,-0.654 -4.689,-0.629 -4.694,-0.603 -4.697,-0.577 -4.699,-0.551 -4.7,-0.525 -4.7,-0.075 -3.925,-0.075 -3.925,-0.55 -3.925,-0.564 -3.923,-0.579 -3.922,-0.593 -3.919,-0.607 -3.916,-0.621 -3.912,-0.635 -3.907,-0.649 -3.901,-0.662 -3.895,-0.675 -3.888,-0.687 -3.881,-0.7 -3.872,-0.712 -3.864,-0.723 -3.854,-0.734 -3.844,-0.744 -3.834,-0.754 -3.823,-0.764 -3.812,-0.772 -3.8,-0.781 -3.788,-0.788 -3.775,-0.795 -3.762,-0.801 -3.749,-0.807 -3.735,-0.812 -3.721,-0.816 -3.707,-0.819 -3.693,-0.822 -3.679,-0.823 -3.664,-0.825 -3.65,-0.825 -3.4,-0.825 -3.384,-0.825 -3.369,-0.823 -3.353,-0.821 -3.338,-0.818 -3.322,-0.815 -3.307,-0.81 -3.292,-0.805 -3.278,-0.799 -3.264,-0.792 -3.25,-0.785 -3.237,-0.777 -3.224,-0.768 -3.211,-0.758 -3.199,-0.748 -3.188,-0.737 -3.177,-0.726 -3.167,-0.714 -3.157,-0.701 -3.148,-0.688 -3.14,-0.675 -3.133,-0.661 -3.126,-0.647 -3.12,-0.633 -3.115,-0.618 -3.11,-0.603 -3.107,-0.587 -3.104,-0.572 -3.102,-0.556 -3.1,-0.541 -3.1,-0.525 -3.1,-0.075
  Bottom Layer region: 3.1,-0.075 2.6,-0.075 2.6,0.875 4.2,0.875 4.226,0.874 4.252,0.872 4.278,0.869 4.304,0.864 4.329,0.858 4.355,0.851 4.379,0.842 4.403,0.832 4.427,0.821 4.45,0.808 4.472,0.794 4.494,0.78 4.515,0.764 4.535,0.747 4.554,0.729 4.572,0.71 4.589,0.69 4.605,0.669 4.619,0.647 4.633,0.625 4.645,0.602 4.657,0.578 4.667,0.554 4.676,0.53 4.683,0.504 4.689,0.479 4.694,0.453 4.697,0.427 4.699,0.401 4.7,0.375 4.7,-0.075 3.925,-0.075 3.925,0.4 3.925,0.414 3.923,0.429 3.922,0.443 3.919,0.457 3.916,0.471 3.912,0.485 3.907,0.499 3.901,0.512 3.895,0.525 3.888,0.537 3.881,0.55 3.872,0.562 3.864,0.573 3.854,0.584 3.844,0.594 3.834,0.604 3.823,0.614 3.812,0.622 3.8,0.631 3.788,0.638 3.775,0.645 3.762,0.651 3.749,0.657 3.735,0.662 3.721,0.666 3.707,0.669 3.693,0.672 3.679,0.673 3.664,0.675 3.65,0.675 3.4,0.675 3.384,0.675 3.369,0.673 3.353,0.671 3.338,0.668 3.322,0.665 3.307,0.66 3.292,0.655 3.278,0.649 3.264,0.642 3.25,0.635 3.237,0.627 3.224,0.618 3.211,0.608 3.199,0.598 3.188,0.587 3.177,0.576 3.167,0.564 3.157,0.551 3.148,0.538 3.14,0.525 3.133,0.511 3.126,0.497 3.12,0.483 3.115,0.468 3.11,0.453 3.107,0.437 3.104,0.422 3.102,0.406 3.1,0.391 3.1,0.375 3.1,-0.075
  silkscreen extent -3.75,-1.53 3.75,4.24, body extent -4.05,-2.7 4.05,3.1, height 2.78
SOD-523 [mil]
  rect 20x14 smd paste+0 mask+0: A(-31.5,0) C(31.5,0)
  silkscreen extent -40,-21 31,21, body extent -33,-17 34,17, height 18
SOT-23-5 [mm]
  rect 1.1x0.65 smd paste-0.102 mask+0.051: 1(-1.2,0.95) 2(-1.2,0) 3(-1.2,-0.95) 4(1.2,-0.95) 5(1.2,0.95)
  silkscreen extent -2.03,-1.55 2.03,1.55, body extent -1.4,-1.45 1.4,1.45, height 1.2
SOT-323 [mil]
  rect 46x18 smd: 1(-37,26) 2(-37,-26) 3(37,0)
  silkscreen extent -41,-39 41,39, body extent -41,-39 41,39, height 42

## Part data
A1: "RX TXRX MODULE WIFI TRACE ANT TH", Supplier Part Number 1=1597-1145-ND, Supplier 1=Digi-Key
C1 C2: library part CL10C470JC8NNNC, "CAP CER 47PF 100V C0G/NP0 0603", Manufacturer_Part_Number=CC0805KRX7R9BB104, Supplier Part Number 1=1276-2299-1-ND, Built_By=EMA_UL_Team, Copyright="Copyright (C) 2018 Accelerated Designs. All rights reserved", RefDes=RefDes, Supplier 1=Digi-Key, Type=DEV, Vendor=Yageo
C3 C4: library part CL10B104KB8NNNC, "CAP CER 0.1UF 50V X7R 0603", Manufacturer_Part_Number=CC0805KRX7R9BB104, Supplier Part Number 1=1276-1000-1-ND, Built_By=EMA_UL_Team, Copyright="Copyright (C) 2018 Accelerated Designs. All rights reserved", RefDes=RefDes, Supplier 1=Digi-Key, Type=DEV, Vendor=Yageo
C5: library part 0603ZD106KAT2A, "CAP CER 10UF 10V X5R 0603", Manufacturer_Part_Number=CC0805KRX7R9BB104, Supplier Part Number 1=478-10766-1-ND, Built_By=EMA_UL_Team, Copyright="Copyright (C) 2018 Accelerated Designs. All rights reserved", RefDes=RefDes, Supplier 1=Digi-Key, Type=DEV, Vendor=Yageo
D1 D2: library part RB520S30T1G, "DIODE SCHOTTKY 30V 200MA SOD523", Package="SOD-323 STMicroelectronics", Supplier Part Number 1=RB520S30T1GOSCT-ND, Availability=Unavailable, MF=STMicroelectronics, MP=BAT20JFILM, Price=None, SnapEDA_Link=https://www.snapeda.com/parts/BAT20JFILM/STMicroelectronics/view-part/110314/?ref=snap, Supplier 1=Digi-Key
D3: library part 1N4148X-TP, "DIODE GEN PURP 75V 150MA SOD523", Package="SOD-323 STMicroelectronics", Supplier Part Number 1=1N4148XTPMSCT-ND, Availability=Unavailable, MF=STMicroelectronics, MP=BAT20JFILM, Price=None, SnapEDA_Link=https://www.snapeda.com/parts/BAT20JFILM/STMicroelectronics/view-part/110314/?ref=snap, Supplier 1=Digi-Key
J1: library part ZX62D-B-5P8(30), "CONN RCPT USB2.0 MICRO B SMD R/A", Supplier Part Number 1=H125272CT-ND, Built_By=EMA_Colton, Copyright="Copyright (C) 2018 Accelerated Designs. All rights reserved", Datasheet=https://www.digikey.com/product-detail/en/hirose-electric-co-ltd/ZX62D-B-5P8-30/H125272TR-ND/5994738, Manufacturer_Part_Number=ZX62D-B-5P8(30), RefDes=RefDes, SourceLibrary=Hirose_2020-02-14, Supplier 1=Digi-Key, Type=DEV, Vendor=Hirose
J2: library part "3x Header Pin", "CONN HEADER VERT 5POS 2.54MM", Manufacturer_Part_Number=77311-818-36LF, Built_By=EMA_UL_Team, Copyright="Copyright (C) 2018 Accelerated Designs. All rights reserved", RefDes=RefDes, SourceLibrary=Amphenol_2013-08-06_Bergstik_1Row_77311, Type=DEV, Vendor=Amphenol
Q1: library part 2N7002PW,115, "MOSFET N-CH 60V 0.31A SOT323", Manufacturer_Part_Number=2N7002,215, Supplier Part Number 1=1727-4793-1-ND, Built_By=EMA_UL_Team, Copyright="Copyright (C) 2018 Accelerated Designs. All rights reserved", RefDes=RefDes, SourceLibrary=NXP_2011-01-01, Supplier 1=Digi-Key, Type=DEV, Vendor=NXP
R1 R4 R5: library part RNCP0603FTD10K0, "RES 10K OHM 1% 1/8W 0603", Manufacturer_Part_Number=RC0805FR-0710KL, Supplier Part Number 1=RNCP0603FTD10K0CT-ND, Built_By=EMA_UL_Team, Copyright="Copyright (C) 2018 Accelerated Designs. All rights reserved", RefDes=RefDes, Supplier 1=Digi-Key, Type=DEV, Vendor=Yageo
R2 R3: library part RC0603FR-0727RL, "RES SMD 27 OHM 1% 1/10W 0603", Manufacturer_Part_Number=RC0805FR-0710KL, Supplier Part Number 1=311-27.0HRCT-ND, Built_By=EMA_UL_Team, Copyright="Copyright (C) 2018 Accelerated Designs. All rights reserved", RefDes=RefDes, Supplier 1=Digi-Key, Type=DEV, Vendor=Yageo
S1: library part KS11R27CQD, "SWITCH PUSH SPST-NO 0.025A 50V", Package=None, Supplier Part Number 1=CKN1592-ND, Digi-Key_Part_Number=CKN4078-ND, Digi-Key_Purchase_URL=https://www.digikey.com/product-detail/en/c-k/KS11R21CQD/CKN4078-ND/332668?utm_source=snapeda&utm_medium=aggregator&utm_campaign=symbol, MF=C&K, MP=KS11R21CQD, SnapEDA_Link=https://www.snapeda.com/parts/KS11R21CQD/C%26K/view-part/288209/?ref=snap, Supplier 1=Digi-Key
U1: library part FT231XS-R, "USB Bridge, USB to UART USB 2.0 UART Interface 20-SSOP", Package="SSOP-20 FTDI", Supplier Part Number 1=768-1129-1-ND, Availability=Unavailable, MF=FTDI,, MP=FT231XS-R, Price=None, SnapEDA_Link=https://www.snapeda.com/parts/FT231XS-R/FTDI%2C%20Future%20Technology%20Devices%20International%20Ltd/view-part/48872/?ref=snap, Supplier 1=Digi-Key
U2: library part SN74LV1T34DBVR, "IC BUF NON-INVERT 5.5V SOT23-5", Manufacturer="Texas Instruments", PartNumber=SN74LV1T34DBV, Supplier Part Number 1=296-37176-1-ND, CompType=IC, Copyright="Copyright (C) 2018 Accelerated Designs. All rights reserved", MountType=SMT, PackageReference=DBV0005A, PIN_COUNT=5, RefDes=RefDes, RoHS=Y, Supplier 1=Digi-Key, SymbolVerison=2014-09-28, Type=DEV

## Via types
v1: diameter 24, hole 12, Top Layer to Bottom Layer, 15 vias

## Nets (pads, with @x,y where several pads share a name; then routed paths per layer and width w, separated by ;. In a path a pad name is that pad's centre, name@x,y a point inside that pad or via, vN(x,y) a via of type N, cw(c..) or ccw(c..) an arc to the next point about the centre after c; other vN are vias at no path point)
+3.3: A1.4 C3.2 R1.1 R4.1 R5.1 U1.3 U1.13 U1.14 | length 1926.6
  Top Layer w15: R1.1@6117.5,1830 6232,1830 6273,1789 6334.5,1789 6372.5,1827 6372.5,1825.86 6376.86,1821.5 6378,1821.5 v1(6410.5,1789) 6421.84,1777.66 6468.94,1777.66 6498.86,1807.58 6498.86,1852.71 6507.65,1861.5 6609.28,1861.5 6639.36,1831.42 6639.36,1816.58 6660.44,1795.5 6819.5,1795.5 A1.4 ; R4.1 6349.36,1369 6379.86,1338.5 6529.32,1338.5 6536,1345.18 ; U1.14 v1(6478.54,1652.5) U1.13 6549.23,1662.89 6575.73,1636.39 6575.73,1568.25 6606.08,1537.89 ; R5.1 6633.36,1369.86 6608.67,1345.18 6536,1345.18 ; U1.3 6606.08,1537.89 ; 6536,1345.18 6536,1467.81 6606.08,1537.89
  Bottom Layer w15: v1(6410.5,1789) 6478.54,1720.96 v1(6478.54,1652.5)
+5: C4.2 C5.2 D1.C D2.C U1.15 U2.5 | length 1250.2
  Top Layer w15: D1.C 6135.38,1371.06 6167.94,1338.5 6285.21,1338.5 6294,1347.29 6294,1401.92 6250,1445.92 v1(6250,1446.92) ; U1.15 6535.28,1612.89 6547.39,1625 v1(6548.23,1625) ; v1(6513.47,1779.63) 6513.47,1782.06 6522.91,1791.5 6522.91,1823.55 C5.2 D2.C
  Bottom Layer w15: v1(6236.22,1662.4) 6237.94,1660.68 6237.94,1647.6 6268.21,1617.34 ; v1(6250,1446.92) 6250,1599.13 6268.21,1617.34 ; v1(6513.47,1779.63) 6523.62,1769.48 6523.62,1707.01 6548.23,1682.4 v1(6548.23,1625) 6545.79,1625 6538.13,1617.34 6268.21,1617.34
GND: A1.8 C1.1 C2.1 C3.1 C4.1 C5.1 J1.5 J1.S1 J1.S2 J1.S3 J1.S4 J1.S5 J1.S6 J2.3 S1.1 U1.6 U1.16 U2.3 | length 3135.7
  Top Layer w15: J1.S6@6000,1466.99 J1.S5 J1.S4 J1.S3@6000,1743.56 ; J1.5 6105.31,1524.45 6118.11,1511.65 J1.S2 6163.72,1458.92 6178,1458.92 6189,1447.92 C4.1 6189,1370.36 C2.1 ; J1.S1 6122.55,1699.91 6236.44,1699.91 6264.18,1727.66 C1.1 ; J1.S1@6118.11,1700.75 6075.29,1743.56 J1.S3@6000,1743.56 ; J1.S1@6118.11,1703.9 6162.6,1748.39 U2.3 ; C5.1@6467.5,1830 6460.86,1836.64 6460.86,1839.64 6439,1861.5 6336,1861.5 6315.86,1841.36 6315.86,1838.5 6310.36,1833 6307.5,1833 6294,1846.5 6248.03,1846.5 6233.03,1861.5 6017.08,1861.5 6000,1844.42 J1.S3@6000,1743.56 ; U1.16 v1@6536.16,1587.89 ; S1.1 6598.73,1739.55 6598.73,1632.36 6618.19,1612.89 U1.6 6737.76,1612.89 6746.15,1604.5 6798.5,1604.5 6812,1618 6812,1661.35 6846.15,1695.5 6891.5,1695.5 6931.12,1655.88 6931.12,1561.16 J2.3
  Bottom Layer w15: J1.S6@6000,1466.99 6075.29,1466.99 6112.83,1504.53 J1.S2 ; v1(6451.77,1812.99) 6525.28,1812.99 S1.1 6575.73,1744.85 6575.73,1613.61 6543.12,1581 v1(6541.59,1581) ; A1.8 6810.5,1404.5 6894.5,1404.5 J2.3@6991.14,1501.14
NetA1_1: A1.1 U1.4 | length 774.8
  Top Layer w8: v1(6616.64,1570.37) 6618.09,1570.37 6625.56,1562.89 U1.4
  Bottom Layer w8: v1(6616.64,1570.37) 6619.7,1573.43 6640.03,1573.43 6642.38,1575.79 6655.61,1575.79 6719.61,1511.79 6721.96,1509.45 6753.06,1509.45 6754.07,1509.45 ccw(c6765,1550) 6794.73,1520.34 6807,1532.6 6807,1609.98 6823,1625.98 6823,1667.4 6847.6,1692 6882.4,1692 6914.37,1660.03 6914.37,1539.97 6866.4,1492 6866.4,1451.4 A1.1
NetA1_2: A1.2 R5.2 | length 289.9
  Top Layer w8: R5.2 6762.83,1370.86 6818.51,1426.54 6818.51,1503.51 A1.2
NetA1_3: A1.3 Q1.1 U1.2 | length 665.2
  Top Layer w8: v1(6609.28,1502.2) 6609.94,1502.2 6620.65,1512.9 U1.2
  Bottom Layer w8: v1(6411.22,1436) 6501.56,1436 6567.75,1502.2 v1(6609.28,1502.2) ; v1@6612.9,1502.2 6663.83,1502.2 6672.58,1493.45 6752.13,1493.45 ccw(c6765,1550) 6770.33,1492.25 cw(c6771.07,1484.28) 6771.01,1492.28 ccw(c6770.67,1539.13) 6781.07,1493.45 6781.93,1493.45 6795.12,1493.45 6823,1521.32 6823,1603.35 6865,1645.35 A1.3
NetA1_5: A1.5 U1.20 | length 418
  Top Layer w8: U1.20 6482.61,1491.96 6520.96,1491.96 6541.59,1512.59 v1(6541.59,1532.6)
  Bottom Layer w8: v1(6541.59,1532.6) 6567.75,1558.77 6567.75,1578.06 6713.7,1724 6739,1724 A1.5
NetA1_6: A1.6 Q1.3 | length 533.8
  Bottom Layer w8: v1(6327,1462) 6504.93,1462 6583.75,1540.82 6583.75,1571.43 6662.32,1650 A1.6
NetA1_7: A1.7 R1.2 U2.2 | length 1103.5
  Top Layer w8: R1.2@6052.5,1830 6052.5,1827 6085.5,1794 6177.26,1794 6200,1771.26 v1(6200,1760)
  Bottom Layer w8: v1(6200,1760) 6284,1844 6747.97,1844 6807,1784.97 6807,1632.6 6766.4,1592 6766.4,1551.4 A1.7
NetD1_A: D1.A J1.1 | length 348.9
  Top Layer w15: D1.A 6026.57,1371.06 6057.09,1401.57 6057.09,1633.73 6074.16,1650.81 6104.94,1650.81 J1.1
NetD2_A: D2.A J2.1 | length 389.7
  Top Layer w15: D2.A 6889.34,1830 6970.35,1748.99 6970.35,1721.93 J2.1
NetD3_A: D3.A Q1.2 R4.2 S1.3 | length 315.6
  Top Layer w8: S1.3 6382,1553.13 6382,1493 Q1.2@6387,1488 ; Q1.2 Q1.2@6387,1488 ; D3.A 6411.22,1370.86 R4.2 6410.36,1371 6366,1415.36 6366,1449.97 6382,1465.97 6382,1483 Q1.2@6387,1488
NetD3_C: D3.C U1.1 | length 182.5
  Top Layer w8: D3.C 6564.5,1370.86 6639.06,1445.42 6639.06,1483.82 6643.13,1487.89 U1.1
NetJ2_2: J2.2 U2.4 | length 1116.2
  Bottom Layer w8: v1@6162,1665 6162,1755.94 6266.06,1860 6814.4,1860 6941.93,1732.47 6941.93,1658.07 J2.2@6995,1605
  other v1: 6162.6,1662.76
USB1_N: C1.2 J1.2 R2.2 | length 352.7
  Top Layer w8: J1.2 6109.11,1621.8 6151.35,1621.8 6193.64,1579.5 6193.64,1570.27 6198.69,1565.22 6205.31,1565.22 6210,1569.91 6210,1581.36 R2.2 6249.96,1592 6254.64,1596.69 6254.64,1612.97 6262.51,1620.84 6322.54,1620.84 6368.36,1666.66 C1.2
USB1_P: C2.2 J1.3 R3.2 | length 360.1
  Top Layer w8: J1.3 6109.11,1603.8 6143.89,1603.8 6175.64,1572.04 6175.64,1562.81 6191.23,1547.22 6205.31,1547.22 6210,1542.53 6210,1531.59 R3.2 6243.31,1520.59 6248,1515.9 6248,1492.89 6223,1467.89 6223,1398.36 6250.36,1371 C2.2
USB2_N: R2.1 U1.12 | length 464.1
  Top Layer w8: R2.1 6325.8,1592 6354.27,1620.48 6371.15,1620.48 6397.36,1646.68 6397.36,1720.51 6427.81,1750.96 6520.93,1750.96 6536.16,1735.73 6536.16,1707.16 6520.96,1691.96 6482.61,1691.96 U1.12
USB2_P: R3.1 U1.11 | length 428.7
  Top Layer w8: R3.1 6292.64,1531.23 6292.64,1542.68 6297.33,1547.37 6311.41,1547.37 6333.01,1568.97 6333.01,1573.76 6361.73,1602.48 6378.6,1602.48 6415.36,1639.23 6415.36,1713.06 6435.27,1732.96 6513.47,1732.96 6518.16,1728.28 6518.16,1721.65 6513.47,1716.96 6482.61,1716.96 U1.11
pads on no net: J1.4 S1. U1.5 U1.7 U1.8 U1.9 U1.10 U1.17 U1.18 U1.19 U2.1

## Silkscreen, mask and mechanical layers (free items; w line width, h text height)
Board Outline:
  the board outline again, w10

## Text inside footprints (layer, text, board x,y; h text height)
D1: Mechanical 13 "*" at 6011.98,1346.06 h50
D2: Mechanical 13 "*" at 6661.36,1855 h50 r180
D3: Mechanical 13 "*" at 6502,1345.86 h50
J1: Mechanical 4 "PCB END" at 5937.99,1363.78 h73.82 r270; Mechanical 4 "PCB END" at 5937.99,1363.78 h73.82 r270